# EAGLE board PAINELVIRGEM (EAGLE 6.3)

Size 113.5 x 123.4 mm. Coordinates in mm from the lower left corner, seen from the top.
Outline: 0,5 0,0 5,0
Outline: 0,5 0,61.7
Outline: 0,61.7 0,118.4
Outline: 0,118.4 0,123.4 5,123.4
Outline: 5,123.4 39.5,123.4
Outline: 39.5,123.4 74,123.4
Outline: 74,123.4 108.5,123.4
Outline: 108.5,123.4 113.5,123.4 113.5,118.4
Outline: 113.5,118.4 113.5,61.7
Outline: 113.5,61.7 113.5,5
Outline: 113.5,5 113.5,0 108.5,0
Outline: 108.5,0 74,0
Outline: 74,0 39.5,0
Outline: 39.5,0 5,0
Outline: 0,5 5,5
Outline: 5,0 5,5
Outline: 5,118.4 0,118.4
Outline: 5,118.4 5,123.4
Outline: 108.5,118.4 108.5,123.4
Outline: 108.5,118.4 113.5,118.4
Outline: 108.5,5 108.5,0
Outline: 108.5,5 113.5,5
Outline: 39.5,123.4 39.5,0
Outline: 74,123.4 74,0
Outline: 0,61.7 113.5,61.7
Outline: 5,5 5,118.4
Outline: 5,5 108.5,5
Outline: 108.5,5 108.5,118.4
Outline: 5,118.4 108.5,118.4
Copper layers (1+4*5+16): Top 0.035mm / dielectric 0.2mm / Route4 0.035mm / dielectric 1.1mm / Route5 0.035mm / dielectric 0.2mm / Bottom 0.035mm
Design rules "LeitorDRC": minimum track width 8mil, minimum drill 0.3mm, track to track 8mil, track to pad 8mil, pad to pad 8mil, via to via 8mil, smd to smd 0mil, copper to edge 10mil, drill to drill 10mil, minimum pad ring 10mil, minimum via ring 6mil, stop-mask expansion 2mil, vias tented up to drill 100mil, thermal gap 10mil

## Footprints (pad centres in the part's own frame; a part is rotated, then mirrored left to right if it is on the bottom)
FIDUCIAL-1.5X3 = smd 1.5 x 1.5: 1 0,0

## Placement (x,y rotation side)
JP1  FIDUCIAL1.5X3  [FIDUCIAL-1.5X3]  2.5,2.5 0 bottom
JP2  FIDUCIAL1.5X3  [FIDUCIAL-1.5X3]  2.5,2.5 0 top
JP3  FIDUCIAL1.5X3  [FIDUCIAL-1.5X3]  2.5,120.9 0 bottom
JP4  FIDUCIAL1.5X3  [FIDUCIAL-1.5X3]  2.5,120.9 0 top
JP5  FIDUCIAL1.5X3  [FIDUCIAL-1.5X3]  111,2.5 0 bottom
JP6  FIDUCIAL1.5X3  [FIDUCIAL-1.5X3]  111,2.5 0 top

## Library data of the parts
JP1-JP6 = REP-BR; CUSTOMERPN: DNP; SPECIAL: DNP

## Text on the board
tPlace: CONTROL ID - LEITORRF V4 | CONTROL ID - LEITORRF V4
bPlace: CONTROL ID - LEITORRF V4 | CONTROL ID - LEITORRF V4